# EAGLE board xr_vco_components_manual_rt1 (EAGLE 7.3.0)
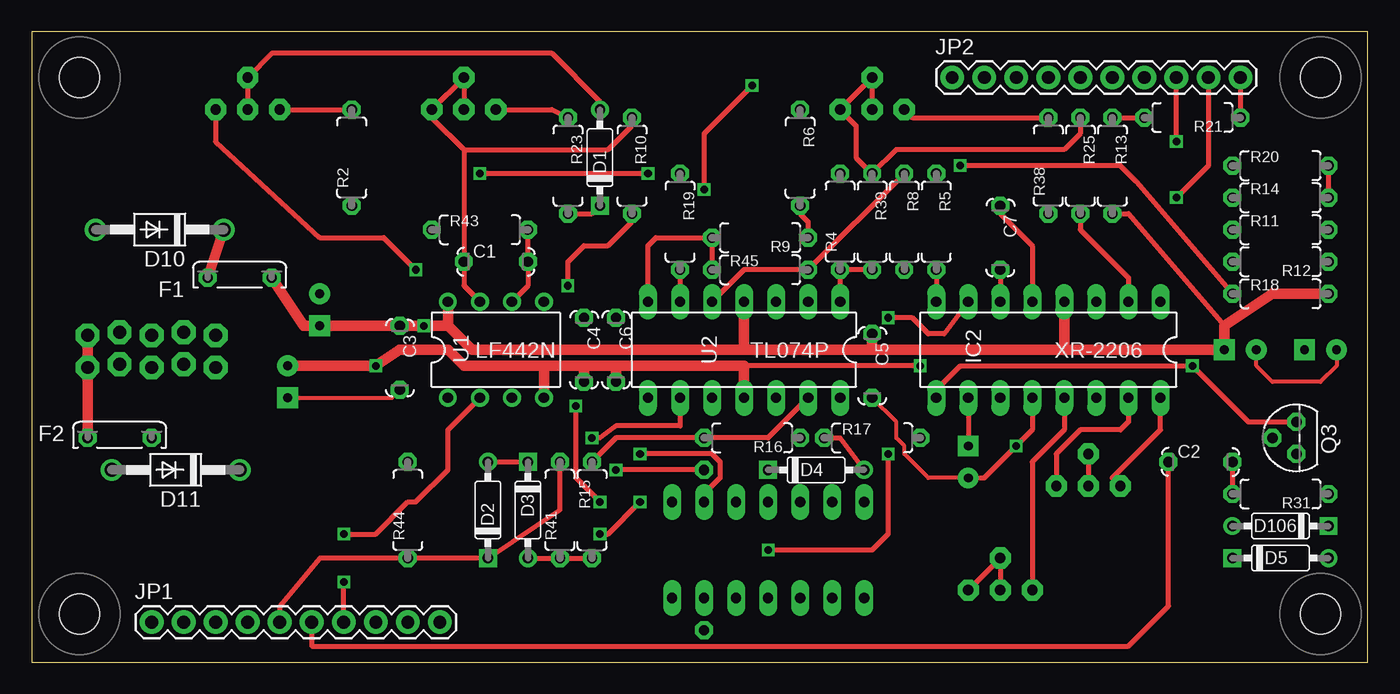
[diagram p0: board, top side]
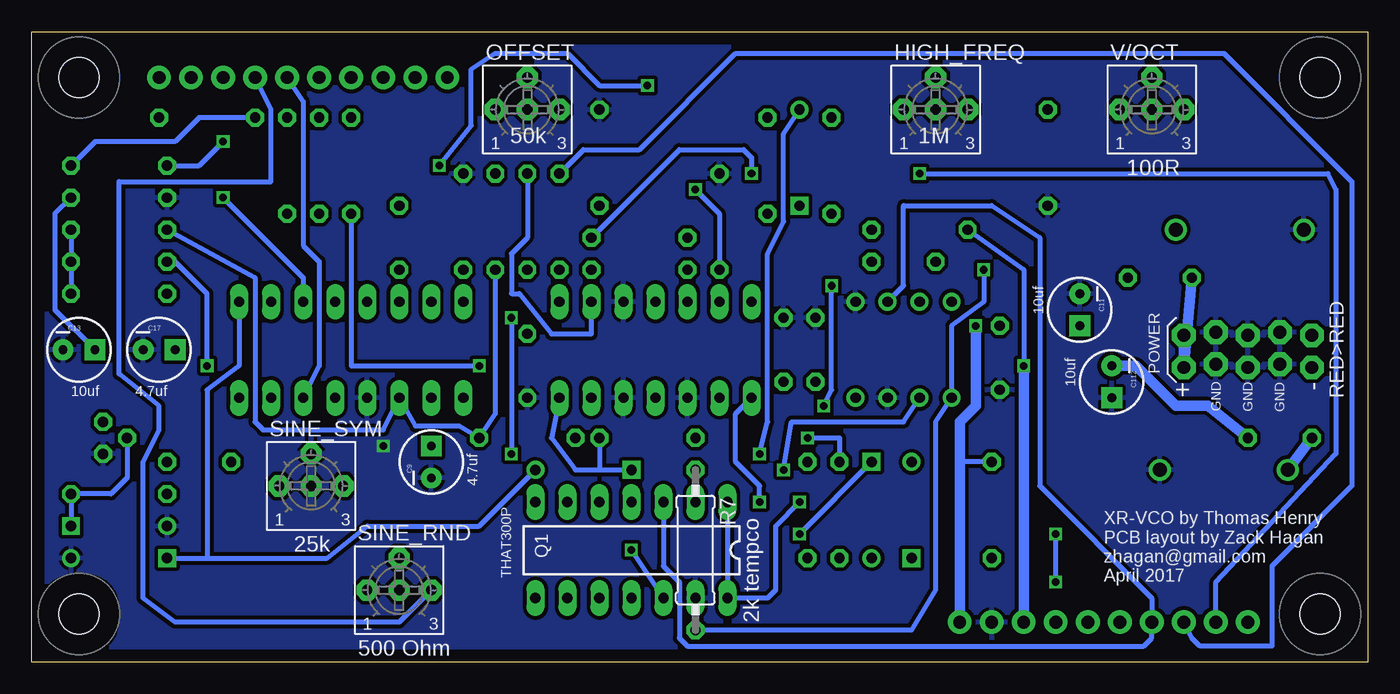
[diagram p1: board, bottom side, seen from below]

Size 106 x 50 mm. Coordinates in mm from the lower left corner, seen from the top.
Outline: 0,0 106,0 106,50 0,50 0,0
Copper layers (1*16): Top 0.035mm / dielectric 1.5mm / Bottom 0.035mm
Design rules "default *": minimum track width 10mil, minimum drill 19mil, track to track 12mil, track to pad 12mil, pad to pad 12mil, via to via 8mil, smd to smd 8mil, copper to edge 40mil, drill to drill 10mil, minimum pad ring 12mil, minimum via ring 8mil, stop-mask expansion 4mil, vias tented up to drill 0mil, thermal gap 10mil
Net classes: 1 power: width 0.406 mm; 2 ground: width 0.305 mm

## Footprints (pad centres in the part's own frame; a part is rotated, then mirrored left to right if it is on the bottom)
C050-024X044 = drill 0.813 octagon: 1 -2.54,0; 2 2.54,0
CPOL-RADIAL-10UF-25V = drill 0.7 pad 1.651 square: 1 1.27,0 | drill 0.7 pad 1.651: 2 -1.27,0
DO35-7 = drill 0.813: A 3.81,0 | drill 0.813 square: C -3.81,0
DO41-10 = drill 1.118: A 5.08,0; C -5.08,0
C050H075X075 = drill 0.813 octagon: 1 -2.54,0; 2 2.54,0
BOURNS_3362P_TRIMMER = drill 0.813 pad 1.676 octagon: 1 -2.54,0; 2 0,2.54; 3 2.54,0; 4 0,0
DIL16 = drill 0.813 long: 1 -8.89,-3.81; 2 -6.35,-3.81; 3 -3.81,-3.81; 4 -1.27,-3.81; 5 1.27,-3.81; 6 3.81,-3.81; 7 6.35,-3.81; 8 8.89,-3.81; 9 8.89,3.81; 10 6.35,3.81; 11 3.81,3.81; 12 1.27,3.81; 13 -1.27,3.81; 14 -3.81,3.81; 15 -6.35,3.81; 16 -8.89,3.81
1X10 = drill 1.016 pad 1.88: 1 0,0; 2 2.54,0; 3 5.08,0; 4 7.62,0; 5 10.16,0; 6 12.7,0; 7 15.24,0; 8 17.78,0; 9 20.32,0; 10 22.86,0
DIL14 = drill 0.813 long: 1 -7.62,-3.81; 2 -5.08,-3.81; 3 -2.54,-3.81; 4 0,-3.81; 5 2.54,-3.81; 6 5.08,-3.81; 7 7.62,-3.81; 8 7.62,3.81; 9 5.08,3.81; 10 2.54,3.81; 11 0,3.81; 12 -2.54,3.81; 13 -5.08,3.81; 14 -7.62,3.81
TO92D = drill 0.813 octagon: B 0,1.905; C 1.27,0; E -1.27,0
7MM_RESISTOR = drill 0.813 octagon: 1 -3.81,0; 2 3.81,0
0309/12 = drill 0.813 octagon: 1 -6.35,0; 2 6.35,0
EURO_PWR_HEADER_LOCK = drill 1.016 pad 1.88 octagon: GND1 -2.54,1.143; GND2 -2.54,-1.397; GND3 0,1.397; GND4 0,-1.143; GND5 2.54,1.143; GND6 2.54,-1.397; NEG1 -5.08,1.397; NEG2 -5.08,-1.143; POS1 5.08,1.397; POS2 5.08,-1.143
DIL08 = drill 0.813 pad 1.27: 1 -3.81,-3.81; 2 -1.27,-3.81; 3 1.27,-3.81; 4 3.81,-3.81; 5 3.81,3.81; 6 1.27,3.81; 7 -1.27,3.81; 8 -3.81,3.81
MOUNTING_HOLE = hole 3.2: 0,0

## Placement (x,y rotation side)
C1  100pf  [C050-024X044]  36.83,31.75 0 top
C2  470pf  [C050-024X044]  92.71,15.88 0 top
C3  100n  [C050-024X044]  29.21,24.13 270 top
C4  100n  [C050-024X044]  43.81,24.77 270 top
C5  100n  [C050-024X044]  66.67,23.5 270 top
C6  100n  [C050-024X044]  46.35,24.77 270 top
C7  0.047uf  [C050-024X044]  76.83,33.66 270 top
C9  4.7uf  [CPOL-RADIAL-10UF-25V]  74.3,15.88 90 bottom
C11  10uf  [CPOL-RADIAL-10UF-25V]  22.86,27.94 270 bottom
C13  10uf  [CPOL-RADIAL-10UF-25V]  102.23,24.77 0 bottom
C17  4.7uf  [CPOL-RADIAL-10UF-25V]  95.89,24.77 0 bottom
C112  10uf  [CPOL-RADIAL-10UF-25V]  20.32,22.23 270 bottom
D1  1N4148  [DO35-7]  45.09,40.01 90 top
D2  1N4148  [DO35-7]  36.2,12.06 90 top
D3  1N4148  [DO35-7]  39.37,12.06 270 top
D4  1N4148  [DO35-7]  62.23,15.24 0 top
D5  1N4148  [DO35-7]  99.06,8.26 0 top
D10  1N4001  [DO41-10]  10.16,34.29 180 top
D11  1N4001  [DO41-10]  11.43,15.24 180 top
D106  1N4148  [DO35-7]  99.06,10.79 180 top
F1  FUSE  [C050H075X075]  16.51,30.48 0 top
F2  FUSE  [C050H075X075]  6.99,17.78 0 top
HIGH_FREQ  1M  [BOURNS_3362P_TRIMMER]  34.29,43.81 0 bottom
IC2  XR-2206  [DIL16]  80.64,24.77 180 top
JP1  M10"  [1X10]  9.53,3.17 0 top
JP2  M10"  [1X10]  73.03,46.35 0 top
OFFSET  50k  [BOURNS_3362P_TRIMMER]  66.67,43.81 0 bottom
Q1  THAT300P  [DIL14]  58.42,8.89 180 bottom
Q3  2N3904  [TO92D]  100.33,17.78 90 top
R2  390R  [7MM_RESISTOR]  25.4,40.01 90 top
R4  1k  [7MM_RESISTOR]  64.14,34.92 90 top
R5  1k  [7MM_RESISTOR]  71.75,34.92 270 top
R6  1.8k  [7MM_RESISTOR]  60.96,40.01 270 top
R7  2k tempco  [0309/12]  53.34,8.89 270 bottom
R8  2.2k  [7MM_RESISTOR]  69.22,34.92 270 top
R9  3k  [7MM_RESISTOR]  57.78,33.66 180 top
R10  4.7k  [7MM_RESISTOR]  47.62,39.37 270 top
R11  4.7k  [7MM_RESISTOR]  99.06,34.29 0 top
R12  4.7k  [7MM_RESISTOR]  99.06,31.75 180 top
R13  5.6k  [7MM_RESISTOR]  85.72,39.37 270 top
R14  5.6k  [7MM_RESISTOR]  99.06,36.83 0 top
R15  10k  [7MM_RESISTOR]  44.45,12.06 270 top
R16  10k  [7MM_RESISTOR]  57.15,17.78 180 top
R17  10k  [7MM_RESISTOR]  66.67,17.78 0 top
R18  10k  [7MM_RESISTOR]  99.06,29.21 0 top
R19  10k  [7MM_RESISTOR]  51.44,34.92 270 top
R20  11k  [7MM_RESISTOR]  99.06,39.37 0 top
R21  20k  [7MM_RESISTOR]  92.08,43.18 180 top
R23  47k  [7MM_RESISTOR]  42.55,39.37 270 top
R25  82k  [7MM_RESISTOR]  83.19,39.37 270 top
R31  100k  [7MM_RESISTOR]  99.06,13.34 180 top
R38  150k  [7MM_RESISTOR]  80.64,39.37 90 top
R39  200k  [7MM_RESISTOR]  66.67,34.92 270 top
R41  220k  [7MM_RESISTOR]  41.91,12.06 90 top
R43  1.2m  [7MM_RESISTOR]  35.56,34.29 0 top
R44  2.2M  [7MM_RESISTOR]  29.84,12.06 90 top
R45  2.2M  [7MM_RESISTOR]  57.78,31.11 0 top
SINE_RND  500 Ohm  [BOURNS_3362P_TRIMMER]  76.83,5.71 0 bottom
SINE_SYM  25k  [BOURNS_3362P_TRIMMER]  83.82,13.97 0 bottom
SV1  EURO_POWER_HEADERLOCK_PADS  [EURO_PWR_HEADER_LOCK]  9.53,24.77 180 bottom
U1  LF442N  [DIL08]  36.83,24.77 0 top
U2  TL074P  [DIL14]  56.52,24.77 180 top
U$1  [MOUNTING_HOLE]  3.81,46.35 0 top
U$2  [MOUNTING_HOLE]  102.23,46.35 0 top
U$3  [MOUNTING_HOLE]  102.23,3.81 0 top
U$4  [MOUNTING_HOLE]  3.81,3.81 0 top
V/OCT  100R  [BOURNS_3362P_TRIMMER]  17.14,43.81 0 bottom

## Library data of the parts
C1-C7 F1 F2 = TomW
C9 C11 C13 C17 C112 = SparkFun-Passives
D1-D5 D106 HIGH_FREQ OFFSET R2 R4-R6 R8-R21 R23 R25 R31 R38 R39 R41 R43-R45 SINE_RND SINE_SYM SV1 U$1-U$4 V/OCT = MusicThingModular
D10 D11 = diode
IC2 = exar; OC_FARNELL: unknown; OC_NEWARK: unknown
JP1 JP2 = SparkFun-Connectors
Q1 = that-corp
Q3 = transistor-small-signal
R7 = resistor
U1 U2 = linear

## Nets
+12V: C3.1 C5.1 C11.1 C17.1 F1.2 IC2.4 JP1.10 R11.2 R12.1 R13.2 R18.2 R44.2 U1.8 U2.4
+12V_INLET [power]: D10.C F1.1 SV1.POS1 SV1.POS2
-12V: C4.2 C6.2 C112.2 F2.2 JP1.8 R38.1 R43.1 U1.4 U2.11
-12V_INLET [power]: D11.A F2.1 SV1.NEG1 SV1.NEG2
CATH_D4: D4.C R16.1 U2.14
GND: C3.2 C4.1 C5.2 C6.1 C9.2 C11.2 C13.2 C17.2 C112.1 D5.A D10.A D11.C D106.A IC2.12 JP1.9 Q1.13 Q3.E R2.1 R5.1 R6.1 R14.1 R19.1 SINE_SYM.2 SINE_SYM.4 SV1.GND1 SV1.GND2 SV1.GND3 SV1.GND4 SV1.GND5 SV1.GND6 U1.3 U1.5 U2.3 U2.10 U2.12
LIN_FM_CV: C1.2 JP1.4 Q1.3 R43.2 U1.6
N$1: IC2.7 Q1.12
N$2: D1.C R23.2
N$3: HIGH_FREQ.1 R23.1
N$5: IC2.2 R25.2
N$7: R7.2 U1.1 V/OCT.3
N$8: OFFSET.2 OFFSET.3 OFFSET.4 R25.1 R39.1 U2.2
N$9: R2.2 V/OCT.1
N$10: D1.A Q1.2 V/OCT.2 V/OCT.4
N$11: Q1.1 Q1.14 R10.2
N$12: OFFSET.1 R38.2
N$13: R4.1 R39.2 U2.1
N$15: C1.1 HIGH_FREQ.2 HIGH_FREQ.3 HIGH_FREQ.4 R10.1 U1.7
N$16: C13.1 R13.1 R14.2 R20.2 R21.2
N$17: IC2.16 SINE_SYM.1
N$20: IC2.13 SINE_RND.1
N$21: IC2.15 SINE_SYM.3
N$22: IC2.8 R5.2
N$23: R18.1 R19.2 U2.6
N$24: R9.2 R45.1 U2.7
N$25: R15.1 R16.2 U2.13
N$26: R8.1 R45.2 U2.5
N$27: D4.A D5.C IC2.1 R17.1
N$28: C2.2 R31.2
N$29: D106.C Q3.B R31.1
N$30: IC2.11 R8.2 R11.1 R17.2
N$31: IC2.9 Q3.C R12.2
N$32: C7.2 IC2.6
N$33: C7.1 IC2.5
N$34: C9.1 IC2.10
N$35: D2.A D3.C U2.8
N$36: D3.A R15.2 R41.1
PITCH_CV: JP1.7 R7.1 U1.2
SINE_TRI_OUT: JP1.3 R4.2
SKEW_IN: D2.C JP1.5 R41.2 R44.1 U2.9
SQR_OUT: JP1.2 R6.2 R9.1
SW_1: JP2.10 R21.1
SW_2: IC2.3 JP2.9
SW_3: JP2.8 R20.1
SW_4: JP2.7 SINE_RND.2 SINE_RND.3 SINE_RND.4
SW_5: IC2.14 JP2.6
SYNC_IN: C2.1 JP1.6

## Tracks (layer width: path | path; a pad name or v marks a point on that pad's centre or on a via)
+12V  (via drill 0.6)
  Top 0.406: R13.2 87,35.56 94.61,26.67
  Top 0.813: F1.2 21.59,26.67 C11.1 C3.1 v31.11,26.67 33.02,26.67 | U1.8 33.02,26.67 | 33.02,26.67 34.92,24.77 56.52,24.77 | U2.4 56.52,24.77 | 66.67,24.77 56.52,24.77 | C5.1 66.67,24.77 | 66.67,24.77 81.92,24.77 | IC2.4 81.92,24.77 | 81.92,24.77 C17.1 94.61,26.67 98.42,29.21 R18.2
  Bottom 0.406: R11.2 R12.1 R18.2 | R44.2 32.38,15.88
  Bottom 0.813: JP1.10 32.38,15.88 32.38,19.05 31.11,20.32 v31.11,26.67
+12V_INLET
  Top 0.813: F1.1 D10.C
  Bottom 0.813: SV1.POS2 SV1.POS1 F1.1
-12V  (via drill 0.6)
  Top 0.406: v70.48,23.5 56.52,23.5
  Top 0.813: U1.4 40.64,23.5 | 40.64,23.5 43.81,23.5 | 43.81,23.5 46.35,23.5 | 46.35,23.5 56.52,23.5 U2.11 | C6.2 46.35,23.5 | C4.2 43.81,23.5 | 40.64,23.5 34.29,23.5 33.02,24.77 29.21,24.77 v27.3,23.5 C112.2
  Bottom 0.406: R38.1 80.64,23.5 v70.48,23.5 | R43.1 27.3,31.11 v27.3,23.5
  Bottom 0.813: F2.2 12.7,20.32 15.24,20.32 18.41,23.5 C112.2 | JP1.8 v27.3,23.5
-12V_INLET
  Top 0.813: SV1.NEG1 SV1.NEG2 F2.1
  Bottom 0.813: F2.1 D11.A
CATH_D4
  Bottom 0.406: U2.14 64.77,17.78 62.87,15.24 60.96,15.24 | 60.96,15.24 D4.C | R16.1 60.96,15.24
GND  (via drill 0.6)
  Top 0.305: C9.2 71.12,14.61 69.22,16.51 69.22,17.14 68.58,17.78 68.58,19.05 C5.2 | C13.2 103.5,23.5 102.23,22.23 98.42,22.23 97.16,23.5 C17.2 | C112.1 28.57,20.95 C3.2
  Top 0.406: IC2.12 79.38,18.41 v78.11,17.14 75.56,14.61 C9.2 | SINE_SYM.2 SINE_SYM.4
  pour Bottom: -0.64,50.8 -0.64,-0.64 106.68,-0.64 106.68,0 106.68,50.8
LIN_FM_CV
  Top 0.406: R43.2 C1.2 39.37,29.84 U1.6
  Bottom 0.406: U1.6 36.83,29.84 36.83,36.2 29.84,36.2 26.04,33.66 26.04,13.97 17.14,5.08 JP1.4 | 17.14,2.54 JP1.4 | Q1.3 55.88,7.62 54.61,6.35 54.61,1.91 53.98,1.27 17.78,1.27 17.14,1.91 JP1.4
N$1  (via drill 0.6)
  Top 0.406: IC2.7 72.39,26.04 71.12,26.04 69.85,27.3 v67.94,27.3 | v67.94,16.51 67.94,10.16 66.67,8.89 v58.42,8.89
  Bottom 0.406: v67.94,27.3 v67.94,16.51 | v58.42,8.89 Q1.12
N$2
  Top 0.406: R23.2 44.45,35.56 D1.C
N$3
  Top 0.406: HIGH_FREQ.1 41.27,43.81 R23.1
N$5
  Top 0.406: R25.2 83.19,34.29 87,30.48 IC2.2
N$7  (via drill 0.6)
  Top 0.406: V/OCT.3 14.61,41.27 22.86,33.66 27.94,33.66 v30.48,31.11
  Bottom 0.406: v30.48,31.11 30.48,28.57 33.02,26.67 U1.1 34.29,19.05 34.29,5.71 36.2,2.54 R7.2
N$8
  Top 0.406: R25.1 83.19,41.91 81.92,40.64 68.58,40.64 R39.1 65.41,40.01 65.41,42.55 OFFSET.3 OFFSET.2 OFFSET.4
  Bottom 0.406: R39.1 66.67,33.66 67.94,32.38 67.94,29.21 67.31,29.21 64.77,26.04 61.59,26.04 U2.2
N$9
  Top 0.406: V/OCT.1 R2.2
N$10  (via drill 0.6)
  Top 0.406: D1.A 45.09,44.45 41.27,48.26 19.05,48.26 V/OCT.2 V/OCT.4 | v48.26,16.51 53.98,16.51 54.61,15.88 54.61,14.61 53.34,13.34 Q1.2
  Bottom 0.406: v48.26,16.51 47.62,19.05 47.62,32.38 46.35,34.92 46.35,41.91 D1.A
N$11  (via drill 0.6)
  Top 0.406: v45.09,12.7 43.18,14.61 v43.18,20.32 | v42.55,29.84 42.55,31.75 43.81,33.02 45.72,33.02 47.62,34.92 R10.2
  Bottom 0.406: Q1.1 Q1.14 47.62,5.08 46.99,5.71 46.99,10.79 v45.09,12.7 | v43.18,20.32 42.55,21.59 v42.55,29.84
N$12
  Top 0.406: OFFSET.1 69.85,43.18 R38.2
N$13
  Top 0.406: R39.2 R4.1 U2.1
N$15
  Top 0.406: 34.29,40.64 45.72,40.64 47.62,42.55 R10.1 | U1.7 34.29,29.84 C1.1 34.29,40.64 | 34.29,40.64 31.75,43.18 HIGH_FREQ.3 HIGH_FREQ.2 HIGH_FREQ.4
N$16
  Top 0.406: R20.2 R14.2 | R13.1 R21.2
  Bottom 0.406: R21.2 92.71,43.18 94.61,41.27 100.97,41.27 R20.2 | R14.2 104.14,35.56 104.14,27.94 C13.1
N$17
  Top 0.406: SINE_SYM.1 85.72,14.61 89.53,18.41 IC2.16
N$20
  Top 0.406: IC2.13 81.92,18.41 79.38,15.88 SINE_RND.1
N$21
  Top 0.406: IC2.15 87,19.05 86.36,18.41 83.19,18.41 81.28,16.51 SINE_SYM.3
N$22
  Top 0.406: R5.2 IC2.8
N$23  (via drill 0.6)
  Top 0.406: R19.2 U2.6 | v73.66,39.37 86.36,39.37 87.63,38.1 R18.1 | v57.15,45.72 53.34,41.91 v53.34,37.47
  Bottom 0.406: v73.66,39.37 71.12,42.55 71.12,46.99 69.22,48.26 63.5,48.26 60.96,45.72 v57.15,45.72 | v53.34,37.47 51.44,35.56 R19.2
N$24
  Top 0.406: R45.1 R9.2 49.53,33.66 48.9,33.02 U2.7
N$25
  Top 0.406: U2.13 58.42,17.78 R16.2 46.35,17.78 R15.1
N$26
  Top 0.406: U2.5 56.52,31.11 R45.2 R8.1
N$27
  Top 0.406: R17.1 64.14,17.78 D4.A
  Bottom 0.406: D5.C 92.08,8.26 | 92.08,8.26 82.55,8.26 79.38,10.79 70.48,10.79 D4.A | IC2.1 89.53,23.5 92.08,21.59 92.08,8.26
N$28
  Top 0.406: C2.2 R31.2
N$29
  Bottom 0.406: D106.C R31.1 99.69,13.34 98.42,14.61 Q3.B
N$30
  Bottom 0.406: R11.1 88.27,30.48 88.27,19.05 87.63,18.41 78.11,18.41 IC2.11 75.56,18.73 72.07,18.73 R17.2 69.22,19.68 R8.2
N$31  (via drill 0.6)
  Top 0.406: IC2.9 71.75,21.59 73.66,23.5 v92.08,23.5 96.52,19.05 Q3.C
  Bottom 0.406: v92.08,23.5 92.08,29.21 94.61,31.75 R12.2
N$32
  Top 0.406: C7.2 IC2.6
N$33
  Top 0.406: C7.1 76.83,35.56 79.38,33.02 IC2.5
N$34
  Top 0.406: IC2.10 C9.1
N$35  (via drill 0.6)
  Top 0.406: D2.A D3.C | v45.09,10.16 45.72,10.16 v48.26,12.7
  Bottom 0.406: D3.C v45.09,10.16 | v48.26,12.7 48.26,13.97 50.16,15.88 50.16,19.68 U2.8
N$36
  Top 0.406: D3.A R41.1 R15.2
PITCH_CV  (via drill 0.6)
  Top 0.406: JP1.7 v24.77,6.35 | R7.1 v46.35,15.24 | v24.77,10.16 27.3,10.16 29.84,12.7 30.48,12.7 33.02,15.24 33.02,18.41 U1.2
  Bottom 0.406: v24.77,6.35 v24.77,10.16 | v46.35,15.24 45.72,19.05 36.83,19.05 U1.2
SINE_TRI_OUT
  Bottom 0.406: R4.2 62.23,40.64 57.78,40.64 50.16,48.26 11.43,48.26 1.27,38.1 1.27,13.97 7.62,7.62 7.62,1.27 13.34,1.27 13.97,1.91 JP1.3
SKEW_IN  (via drill 0.6)
  Top 0.406: JP1.5 19.68,4.45 22.86,8.26 28.57,8.26 R44.1 D2.C 41.91,12.06 R41.2 | U2.9 51.44,18.73 46.35,18.73 45.09,17.78 v44.45,17.78
  Bottom 0.406: v44.45,17.78 41.91,17.78 R41.2
SQR_OUT  (via drill 0.6)
  Top 0.406: R6.2 60.96,35.56 61.59,34.92 R9.1 | v48.9,38.73 v35.56,38.73
  Bottom 0.406: JP1.2 12.06,6.35 2.54,16.51 2.54,37.47 3.17,38.73 v35.56,38.73 | R9.1 54.61,40.64 49.53,40.64 48.9,40.01 v48.9,38.73
SW_1
  Top 0.406: JP2.10 R21.1
SW_2  (via drill 0.6)
  Top 0.406: JP2.9 93.34,39.37 v90.81,36.83
  Bottom 0.406: v90.81,36.83 84.45,30.48 IC2.3
SW_3  (via drill 0.6)
  Top 0.406: v90.81,41.27 JP2.8
  Bottom 0.406: R20.1 92.71,39.37 v90.81,41.27
SW_4
  Top 0.406: SINE_RND.3 SINE_RND.2 SINE_RND.4
  Bottom 0.406: SINE_RND.3 76.83,3.17 94.61,3.17 97.16,5.08 97.16,15.88 95.89,18.41 95.89,20.32 99.06,22.86 99.06,38.1 87,38.1 87,43.81 JP2.7
SW_5
  Bottom 0.406: JP2.6 84.45,44.45 84.45,33.02 83.19,31.75 83.19,23.5 IC2.14
SYNC_IN
  Top 0.406: JP1.6 22.23,1.27 87,1.27 90.17,4.45 C2.1

## Text on the board
bNames: XR-VCO by Thomas Henry / PCB layout by Zack Hagan / zhagan@gmail.com / April 2017